# EAGLE board sensor_node_top_layer-Panel (EAGLE 9.6.0)
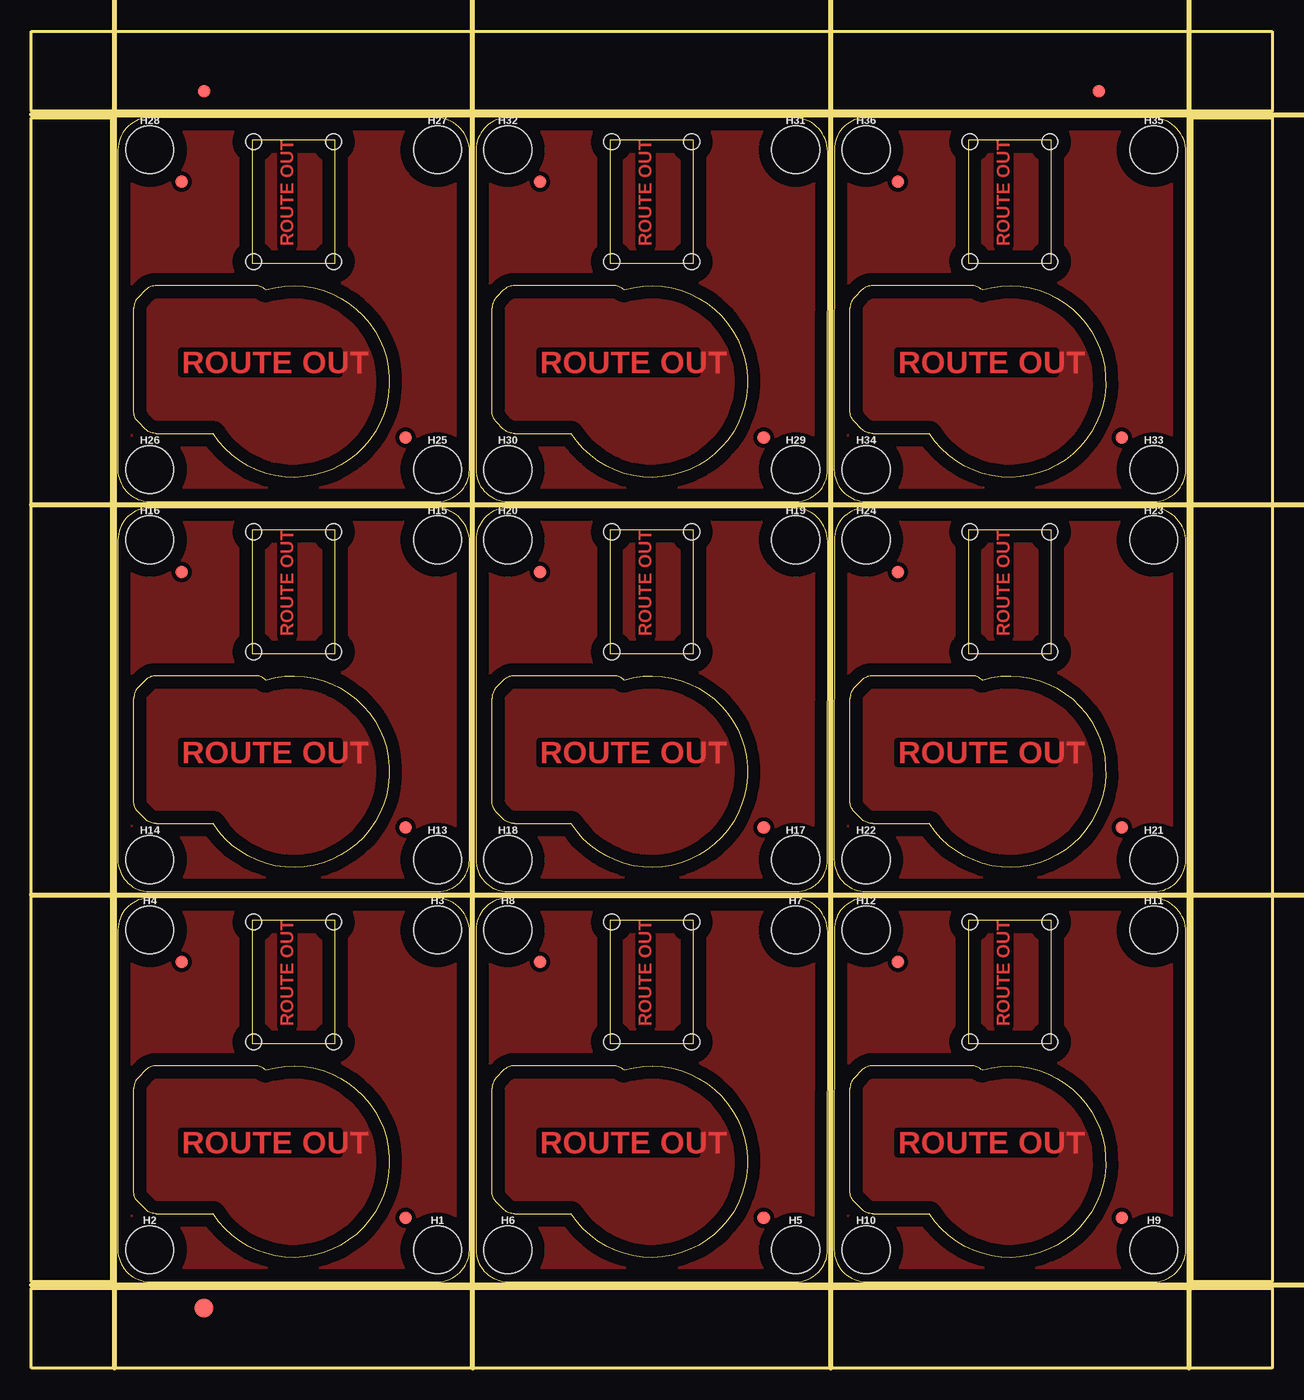
[diagram p0: board, top side]
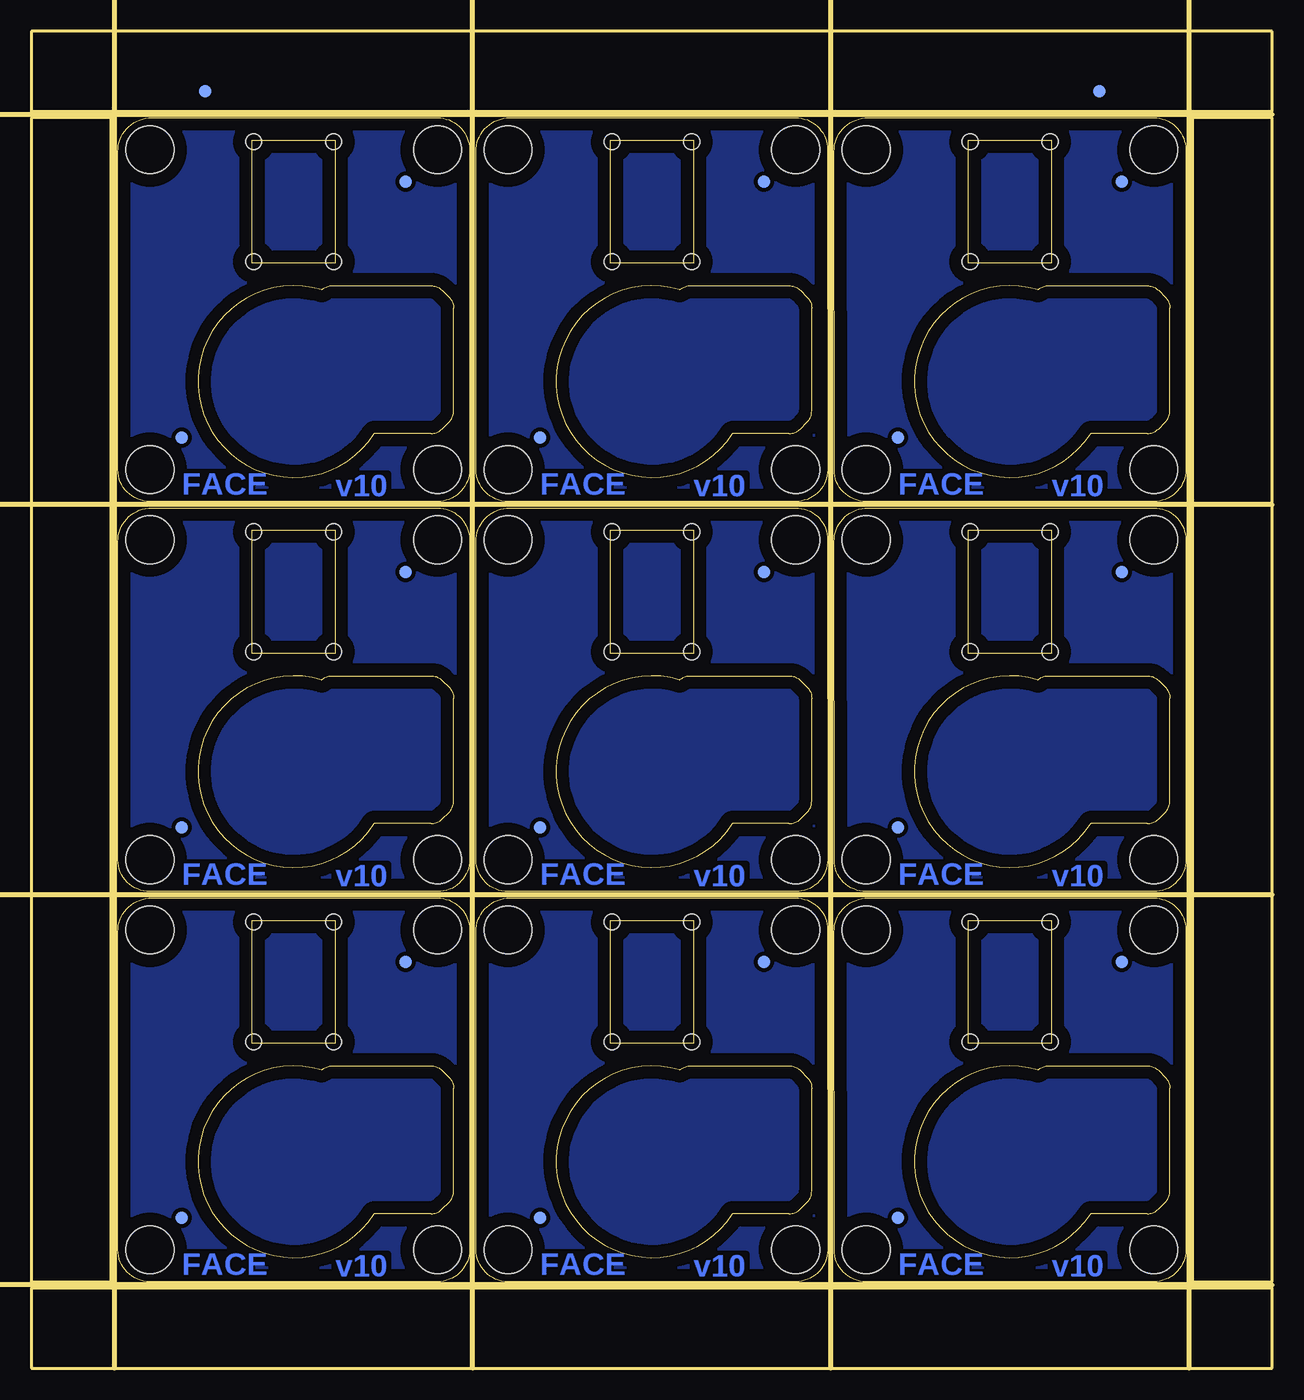
[diagram p1: board, bottom side, seen from below]

Size 98.56 x 106.17 mm. Coordinates in mm from the lower left corner, seen from the top.
Outline: 6.87,34.81 6.86,9.4 arc90 9.4,6.86 32.26,6.86 arc90 34.79,9.39 34.8,34.65 arc90 32.12,37.34 9.4,37.34 arc90 6.87,34.81
Outline: 17.53,35.56 17.53,25.78 24.13,25.78 24.13,35.56 17.53,35.56
Outline: 9.92,12.25 arc-45 9.03,12.63 8.5,13.15 arc-45 8.13,14.05 8.13,22.21 arc-45 8.5,23.11 9.03,23.63 arc-45 9.92,24 17.76,24 arc-42 18.62,23.67 arc-254 14.43,12.25 9.92,12.25
Outline: 35.32,34.81 35.31,9.4 arc90 37.85,6.86 60.71,6.86 arc90 63.24,9.39 63.25,34.65 arc90 60.56,37.34 37.85,37.34 arc90 35.32,34.81
Outline: 45.98,35.56 45.98,25.78 52.58,25.78 52.58,35.56 45.98,35.56
Outline: 38.38,12.25 arc-45 37.48,12.63 36.95,13.15 arc-45 36.58,14.05 36.58,22.21 arc-45 36.95,23.11 37.48,23.63 arc-45 38.38,24 46.21,24 arc-42 47.07,23.67 arc-254 42.88,12.25 38.38,12.25
Outline: 63.77,34.81 63.76,9.4 arc90 66.3,6.86 89.16,6.86 arc90 91.7,9.39 91.7,34.65 arc90 89.02,37.34 66.3,37.34 arc90 63.77,34.81
Outline: 74.43,35.56 74.43,25.78 81.03,25.78 81.03,35.56 74.43,35.56
Outline: 66.83,12.25 arc-45 65.93,12.63 65.4,13.15 arc-45 65.03,14.05 65.03,22.21 arc-45 65.4,23.11 65.93,23.63 arc-45 66.83,24 74.66,24 arc-42 75.52,23.67 arc-254 71.33,12.25 66.83,12.25
Outline: 6.87,65.79 6.86,40.39 arc90 9.4,37.85 32.26,37.85 arc90 34.79,40.38 34.8,65.64 arc90 32.12,68.33 9.4,68.33 arc90 6.87,65.79
Outline: 17.53,66.55 17.53,56.77 24.13,56.77 24.13,66.55 17.53,66.55
Outline: 9.92,43.24 arc-45 9.03,43.61 8.5,44.14 arc-45 8.13,45.04 8.13,53.2 arc-45 8.5,54.09 9.03,54.62 arc-45 9.92,54.99 17.76,54.99 arc-42 18.62,54.66 arc-254 14.43,43.24 9.92,43.24
Outline: 35.32,65.79 35.31,40.39 arc90 37.85,37.85 60.71,37.85 arc90 63.24,40.38 63.25,65.64 arc90 60.56,68.33 37.85,68.33 arc90 35.32,65.79
Outline: 45.98,66.55 45.98,56.77 52.58,56.77 52.58,66.55 45.98,66.55
Outline: 38.38,43.24 arc-45 37.48,43.61 36.95,44.14 arc-45 36.58,45.04 36.58,53.2 arc-45 36.95,54.09 37.48,54.62 arc-45 38.38,54.99 46.21,54.99 arc-42 47.07,54.66 arc-254 42.88,43.24 38.38,43.24
Outline: 63.77,65.79 63.76,40.39 arc90 66.3,37.85 89.16,37.85 arc90 91.7,40.38 91.7,65.64 arc90 89.02,68.33 66.3,68.33 arc90 63.77,65.79
Outline: 74.43,66.55 74.43,56.77 81.03,56.77 81.03,66.55 74.43,66.55
Outline: 66.83,43.24 arc-45 65.93,43.61 65.4,44.14 arc-45 65.03,45.04 65.03,53.2 arc-45 65.4,54.09 65.93,54.62 arc-45 66.83,54.99 74.66,54.99 arc-42 75.52,54.66 arc-254 71.33,43.24 66.83,43.24
Outline: 6.87,96.78 6.86,71.38 arc90 9.4,68.83 32.26,68.83 arc90 34.79,71.37 34.8,96.62 arc90 32.12,99.31 9.4,99.31 arc90 6.87,96.78
Outline: 17.53,97.54 17.53,87.76 24.13,87.76 24.13,97.54 17.53,97.54
Outline: 9.92,74.23 arc-45 9.03,74.6 8.5,75.13 arc-45 8.13,76.03 8.13,84.18 arc-45 8.5,85.08 9.03,85.61 arc-45 9.92,85.98 17.76,85.98 arc-42 18.62,85.65 arc-254 14.43,74.23 9.92,74.23
Outline: 35.32,96.78 35.31,71.38 arc90 37.85,68.83 60.71,68.83 arc90 63.24,71.37 63.25,96.62 arc90 60.56,99.31 37.85,99.31 arc90 35.32,96.78
Outline: 45.98,97.54 45.98,87.76 52.58,87.76 52.58,97.54 45.98,97.54
Outline: 38.38,74.23 arc-45 37.48,74.6 36.95,75.13 arc-45 36.58,76.03 36.58,84.18 arc-45 36.95,85.08 37.48,85.61 arc-45 38.38,85.98 46.21,85.98 arc-42 47.07,85.65 arc-254 42.88,74.23 38.38,74.23
Outline: 63.77,96.78 63.76,71.38 arc90 66.3,68.83 89.16,68.83 arc90 91.7,71.37 91.7,96.62 arc90 89.02,99.31 66.3,99.31 arc90 63.77,96.78
Outline: 74.43,97.54 74.43,87.76 81.03,87.76 81.03,97.54 74.43,97.54
Outline: 66.83,74.23 arc-45 65.93,74.6 65.4,75.13 arc-45 65.03,76.03 65.03,84.18 arc-45 65.4,85.08 65.93,85.61 arc-45 66.83,85.98 74.66,85.98 arc-42 75.52,85.65 arc-254 71.33,74.23 66.83,74.23
Outline: 0,6.35 98.56,6.35 98.56,0 0,0 0,6.35
Outline: 92.21,99.31 98.56,99.31 98.56,6.86 92.21,6.86 92.21,99.31
Outline: 0,106.17 98.56,106.17 98.56,99.82 0,99.82 0,106.17
Outline: 0,99.31 6.35,99.31 6.35,6.86 0,6.86 0,99.31
Copper layers (1*16): Top 0.035mm / dielectric 1.5mm / Bottom 0.035mm
Design rules "sensor_node_top_layer": minimum track width 6mil, minimum drill 0.35mm, track to track 6mil, track to pad 6mil, pad to pad 6mil, via to via 6mil, smd to smd 6mil, copper to edge 40mil, drill to drill 6mil, minimum pad ring 10mil, minimum via ring 8mil, stop-mask expansion 4mil, vias tented up to drill 0mil, thermal gap 10mil
Holes 1.27 mm at 17.65,35.43 24,35.43 17.65,25.91 24,25.91 46.1,35.43 52.45,35.43 46.1,25.91 52.45,25.91 74.55,35.43 80.9,35.43 74.55,25.91 80.9,25.91 17.65,66.42 24,66.42 17.65,56.9 24,56.9 46.1,66.42 52.45,66.42 46.1,56.9 52.45,56.9 74.55,66.42 80.9,66.42 74.55,56.9 80.9,56.9 17.65,97.41 24,97.41 17.65,87.88 24,87.88 46.1,97.41 52.45,97.41 46.1,87.88 52.45,87.88 74.55,97.41 80.9,97.41 74.55,87.88 80.9,87.88
Milling: 8 lines

## Footprints (pad centres in the part's own frame; a part is rotated, then mirrored left to right if it is on the bottom)
FIDUCIAL-1X2 = smd 1 x 1: 1 0,0
FIDUCIAL-1.5X3 = smd 1.5 x 1.5: 1 0,0
STAND-OFF-#8 = hole 3.81: 0,0

## Placement (x,y rotation side)
E$1  [FIDUCIAL-1X2]  13.72,101.41 0 top
E$2  [FIDUCIAL-1X2]  13.72,101.41 0 bottom
E$3  [FIDUCIAL-1X2]  84.78,101.41 0 top
E$4  [FIDUCIAL-1X2]  84.78,101.41 0 bottom
E$5  [FIDUCIAL-1.5X3]  13.72,4.76 0 top
FD1  FIDUCIAL1X2  [FIDUCIAL-1X2]  11.94,32.26 0 top
FD2  FIDUCIAL1X2  [FIDUCIAL-1X2]  29.72,11.94 0 top
FD3  FIDUCIAL1X2  [FIDUCIAL-1X2]  11.94,32.26 0 bottom
FD4  FIDUCIAL1X2  [FIDUCIAL-1X2]  29.72,11.94 0 bottom
FD5  FIDUCIAL1X2  [FIDUCIAL-1X2]  40.39,32.26 0 top
FD6  FIDUCIAL1X2  [FIDUCIAL-1X2]  58.17,11.94 0 top
FD7  FIDUCIAL1X2  [FIDUCIAL-1X2]  40.39,32.26 0 bottom
FD8  FIDUCIAL1X2  [FIDUCIAL-1X2]  58.17,11.94 0 bottom
FD9  FIDUCIAL1X2  [FIDUCIAL-1X2]  68.84,32.26 0 top
FD10  FIDUCIAL1X2  [FIDUCIAL-1X2]  86.62,11.94 0 top
FD11  FIDUCIAL1X2  [FIDUCIAL-1X2]  68.84,32.26 0 bottom
FD12  FIDUCIAL1X2  [FIDUCIAL-1X2]  86.62,11.94 0 bottom
FD13  FIDUCIAL1X2  [FIDUCIAL-1X2]  11.94,63.25 0 top
FD14  FIDUCIAL1X2  [FIDUCIAL-1X2]  29.72,42.93 0 top
FD15  FIDUCIAL1X2  [FIDUCIAL-1X2]  11.94,63.25 0 bottom
FD16  FIDUCIAL1X2  [FIDUCIAL-1X2]  29.72,42.93 0 bottom
FD17  FIDUCIAL1X2  [FIDUCIAL-1X2]  40.39,63.25 0 top
FD18  FIDUCIAL1X2  [FIDUCIAL-1X2]  58.17,42.93 0 top
FD19  FIDUCIAL1X2  [FIDUCIAL-1X2]  40.39,63.25 0 bottom
FD20  FIDUCIAL1X2  [FIDUCIAL-1X2]  58.17,42.93 0 bottom
FD21  FIDUCIAL1X2  [FIDUCIAL-1X2]  68.84,63.25 0 top
FD22  FIDUCIAL1X2  [FIDUCIAL-1X2]  86.62,42.93 0 top
FD23  FIDUCIAL1X2  [FIDUCIAL-1X2]  68.84,63.25 0 bottom
FD24  FIDUCIAL1X2  [FIDUCIAL-1X2]  86.62,42.93 0 bottom
FD25  FIDUCIAL1X2  [FIDUCIAL-1X2]  11.94,94.23 0 top
FD26  FIDUCIAL1X2  [FIDUCIAL-1X2]  29.72,73.91 0 top
FD27  FIDUCIAL1X2  [FIDUCIAL-1X2]  11.94,94.23 0 bottom
FD28  FIDUCIAL1X2  [FIDUCIAL-1X2]  29.72,73.91 0 bottom
FD29  FIDUCIAL1X2  [FIDUCIAL-1X2]  40.39,94.23 0 top
FD30  FIDUCIAL1X2  [FIDUCIAL-1X2]  58.17,73.91 0 top
FD31  FIDUCIAL1X2  [FIDUCIAL-1X2]  40.39,94.23 0 bottom
FD32  FIDUCIAL1X2  [FIDUCIAL-1X2]  58.17,73.91 0 bottom
FD33  FIDUCIAL1X2  [FIDUCIAL-1X2]  68.84,94.23 0 top
FD34  FIDUCIAL1X2  [FIDUCIAL-1X2]  86.62,73.91 0 top
FD35  FIDUCIAL1X2  [FIDUCIAL-1X2]  68.84,94.23 0 bottom
FD36  FIDUCIAL1X2  [FIDUCIAL-1X2]  86.62,73.91 0 bottom
H1  STAND-OFF  [STAND-OFF-#8]  32.26,9.4 0 top
H2  STAND-OFF  [STAND-OFF-#8]  9.4,9.4 0 top
H3  STAND-OFF  [STAND-OFF-#8]  32.26,34.8 0 top
H4  STAND-OFF  [STAND-OFF-#8]  9.4,34.8 0 top
H5  STAND-OFF  [STAND-OFF-#8]  60.71,9.4 0 top
H6  STAND-OFF  [STAND-OFF-#8]  37.85,9.4 0 top
H7  STAND-OFF  [STAND-OFF-#8]  60.71,34.8 0 top
H8  STAND-OFF  [STAND-OFF-#8]  37.85,34.8 0 top
H9  STAND-OFF  [STAND-OFF-#8]  89.16,9.4 0 top
H10  STAND-OFF  [STAND-OFF-#8]  66.3,9.4 0 top
H11  STAND-OFF  [STAND-OFF-#8]  89.16,34.8 0 top
H12  STAND-OFF  [STAND-OFF-#8]  66.3,34.8 0 top
H13  STAND-OFF  [STAND-OFF-#8]  32.26,40.39 0 top
H14  STAND-OFF  [STAND-OFF-#8]  9.4,40.39 0 top
H15  STAND-OFF  [STAND-OFF-#8]  32.26,65.79 0 top
H16  STAND-OFF  [STAND-OFF-#8]  9.4,65.79 0 top
H17  STAND-OFF  [STAND-OFF-#8]  60.71,40.39 0 top
H18  STAND-OFF  [STAND-OFF-#8]  37.85,40.39 0 top
H19  STAND-OFF  [STAND-OFF-#8]  60.71,65.79 0 top
H20  STAND-OFF  [STAND-OFF-#8]  37.85,65.79 0 top
H21  STAND-OFF  [STAND-OFF-#8]  89.16,40.39 0 top
H22  STAND-OFF  [STAND-OFF-#8]  66.3,40.39 0 top
H23  STAND-OFF  [STAND-OFF-#8]  89.16,65.79 0 top
H24  STAND-OFF  [STAND-OFF-#8]  66.3,65.79 0 top
H25  STAND-OFF  [STAND-OFF-#8]  32.26,71.37 0 top
H26  STAND-OFF  [STAND-OFF-#8]  9.4,71.37 0 top
H27  STAND-OFF  [STAND-OFF-#8]  32.26,96.77 0 top
H28  STAND-OFF  [STAND-OFF-#8]  9.4,96.77 0 top
H29  STAND-OFF  [STAND-OFF-#8]  60.71,71.37 0 top
H30  STAND-OFF  [STAND-OFF-#8]  37.85,71.37 0 top
H31  STAND-OFF  [STAND-OFF-#8]  60.71,96.77 0 top
H32  STAND-OFF  [STAND-OFF-#8]  37.85,96.77 0 top
H33  STAND-OFF  [STAND-OFF-#8]  89.16,71.37 0 top
H34  STAND-OFF  [STAND-OFF-#8]  66.3,71.37 0 top
H35  STAND-OFF  [STAND-OFF-#8]  89.16,96.77 0 top
H36  STAND-OFF  [STAND-OFF-#8]  66.3,96.77 0 top

## Library data of the parts
E$1-E$4 FD1-FD36 = SparkFun-Aesthetics
E$5 = SparkFun-Retired
H1-H36 = standoff

## Tracks (layer width: path | path; a pad name or v marks a point on that pad's centre or on a via)
GND
  pour Bottom (isolate 0.305): 32.26,6.86 9.4,6.86 arc-90 6.86,9.4 6.86,34.8 arc-90 9.4,37.34 32.26,37.34 arc-90 34.8,34.8 34.8,9.4 arc-90
  pour Top (isolate 0.305): 32.26,6.86 9.4,6.86 arc-90 6.86,9.4 6.86,34.8 arc-90 9.4,37.34 32.26,37.34 arc-90 34.8,34.8 34.8,9.4 arc-90
GND1
  pour Bottom (isolate 0.305): 60.71,6.86 37.85,6.86 arc-90 35.31,9.4 35.31,34.8 arc-90 37.85,37.34 60.71,37.34 arc-90 63.25,34.8 63.25,9.4 arc-90
  pour Top (isolate 0.305): 60.71,6.86 37.85,6.86 arc-90 35.31,9.4 35.31,34.8 arc-90 37.85,37.34 60.71,37.34 arc-90 63.25,34.8 63.25,9.4 arc-90
GND2
  pour Bottom (isolate 0.305): 89.16,6.86 66.3,6.86 arc-90 63.76,9.4 63.76,34.8 arc-90 66.3,37.34 89.16,37.34 arc-90 91.7,34.8 91.7,9.4 arc-90
  pour Top (isolate 0.305): 89.16,6.86 66.3,6.86 arc-90 63.76,9.4 63.76,34.8 arc-90 66.3,37.34 89.16,37.34 arc-90 91.7,34.8 91.7,9.4 arc-90
GND3
  pour Bottom (isolate 0.305): 32.26,37.85 9.4,37.85 arc-90 6.86,40.39 6.86,65.79 arc-90 9.4,68.33 32.26,68.33 arc-90 34.8,65.79 34.8,40.39 arc-90
  pour Top (isolate 0.305): 32.26,37.85 9.4,37.85 arc-90 6.86,40.39 6.86,65.79 arc-90 9.4,68.33 32.26,68.33 arc-90 34.8,65.79 34.8,40.39 arc-90
GND4
  pour Bottom (isolate 0.305): 60.71,37.85 37.85,37.85 arc-90 35.31,40.39 35.31,65.79 arc-90 37.85,68.33 60.71,68.33 arc-90 63.25,65.79 63.25,40.39 arc-90
  pour Top (isolate 0.305): 60.71,37.85 37.85,37.85 arc-90 35.31,40.39 35.31,65.79 arc-90 37.85,68.33 60.71,68.33 arc-90 63.25,65.79 63.25,40.39 arc-90
GND5
  pour Bottom (isolate 0.305): 89.16,37.85 66.3,37.85 arc-90 63.76,40.39 63.76,65.79 arc-90 66.3,68.33 89.16,68.33 arc-90 91.7,65.79 91.7,40.39 arc-90
  pour Top (isolate 0.305): 89.16,37.85 66.3,37.85 arc-90 63.76,40.39 63.76,65.79 arc-90 66.3,68.33 89.16,68.33 arc-90 91.7,65.79 91.7,40.39 arc-90
GND6
  pour Bottom (isolate 0.305): 32.26,68.83 9.4,68.83 arc-90 6.86,71.37 6.86,96.77 arc-90 9.4,99.31 32.26,99.31 arc-90 34.8,96.77 34.8,71.37 arc-90
  pour Top (isolate 0.305): 32.26,68.83 9.4,68.83 arc-90 6.86,71.37 6.86,96.77 arc-90 9.4,99.31 32.26,99.31 arc-90 34.8,96.77 34.8,71.37 arc-90
GND7
  pour Bottom (isolate 0.305): 60.71,68.83 37.85,68.83 arc-90 35.31,71.37 35.31,96.77 arc-90 37.85,99.31 60.71,99.31 arc-90 63.25,96.77 63.25,71.37 arc-90
  pour Top (isolate 0.305): 60.71,68.83 37.85,68.83 arc-90 35.31,71.37 35.31,96.77 arc-90 37.85,99.31 60.71,99.31 arc-90 63.25,96.77 63.25,71.37 arc-90
GND8
  pour Bottom (isolate 0.305): 89.16,68.83 66.3,68.83 arc-90 63.76,71.37 63.76,96.77 arc-90 66.3,99.31 89.16,99.31 arc-90 91.7,96.77 91.7,71.37 arc-90
  pour Top (isolate 0.305): 89.16,68.83 66.3,68.83 arc-90 63.76,71.37 63.76,96.77 arc-90 66.3,99.31 89.16,99.31 arc-90 91.7,96.77 91.7,71.37 arc-90

## Text on the board
Top: ROUTE OUT | ROUTE OUT | ROUTE OUT | ROUTE OUT | ROUTE OUT | ROUTE OUT | ROUTE OUT | ROUTE OUT | ROUTE OUT | ROUTE OUT | ROUTE OUT | ROUTE OUT | ROUTE OUT | ROUTE OUT | ROUTE OUT | ROUTE OUT | ROUTE OUT | ROUTE OUT
Bottom: v10 | FACE | v10 | FACE | v10 | FACE | v10 | FACE | v10 | FACE | v10 | FACE | FACE | FACE | FACE | v10 | v10 | v10
Milling: v-score | v-score | v-score | v-score | v-score | v-score | v-score | v-score